# EAGLE board openmv-cc (EAGLE 6.1)
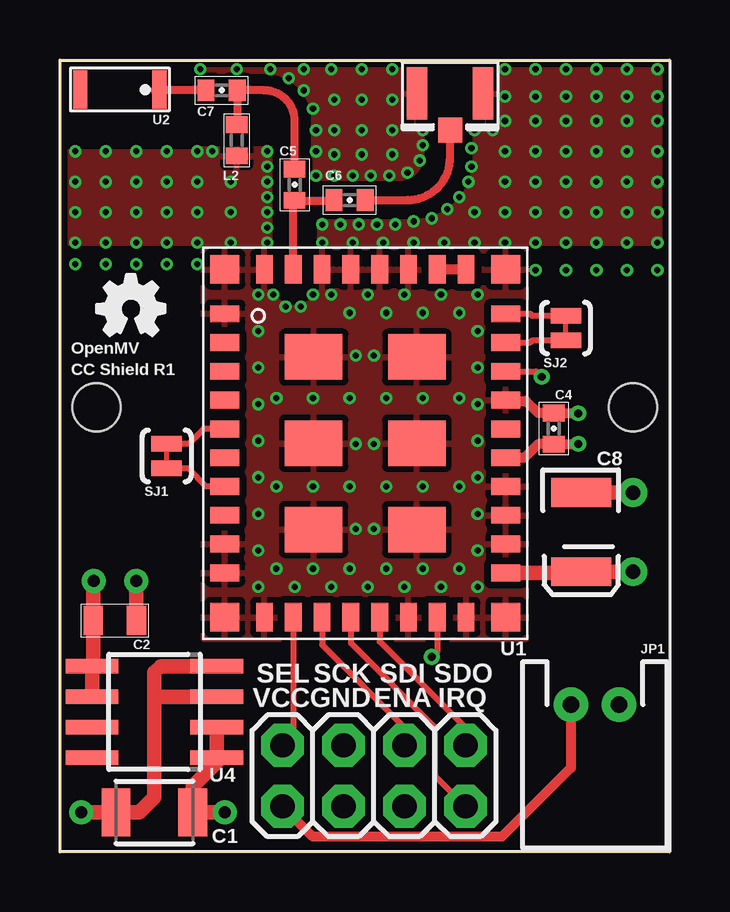
[diagram p0: board, top side]
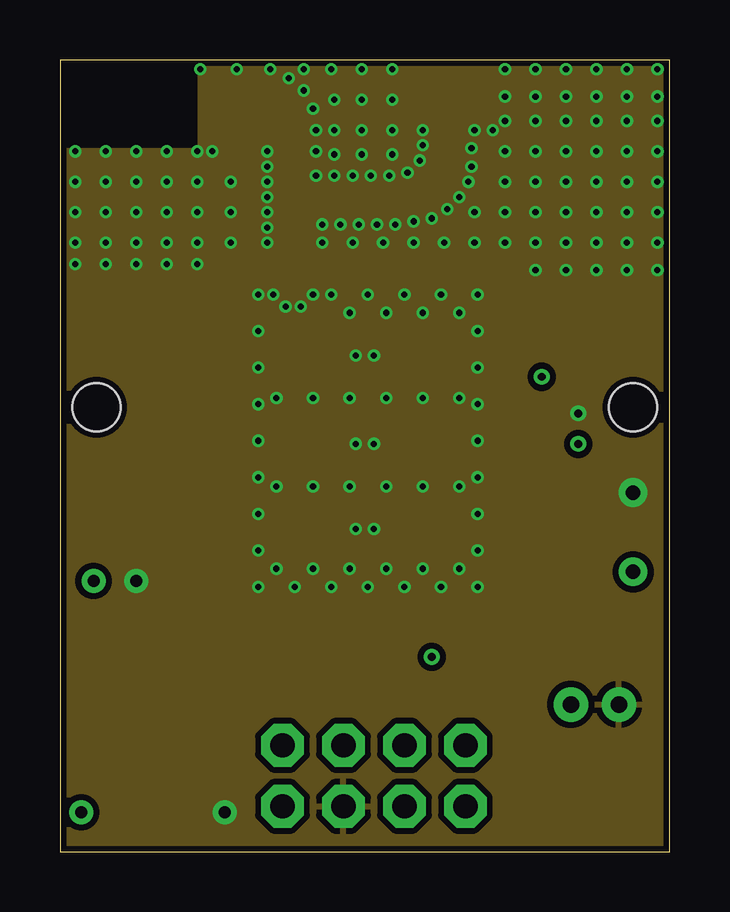
[diagram p1: board, inner layer Route2]
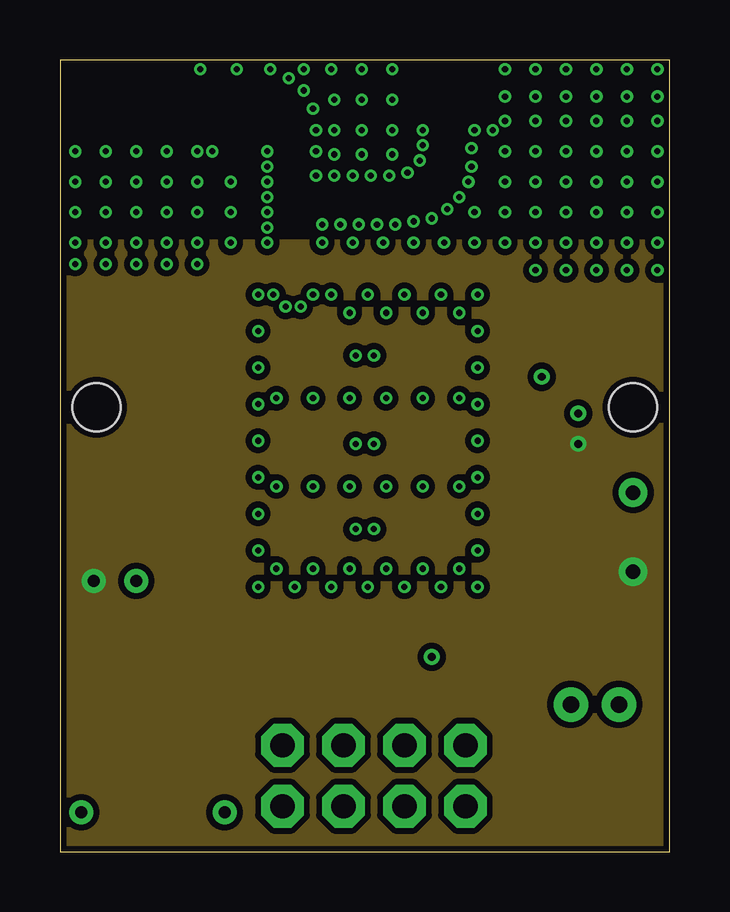
[diagram p2: board, inner layer Route15]
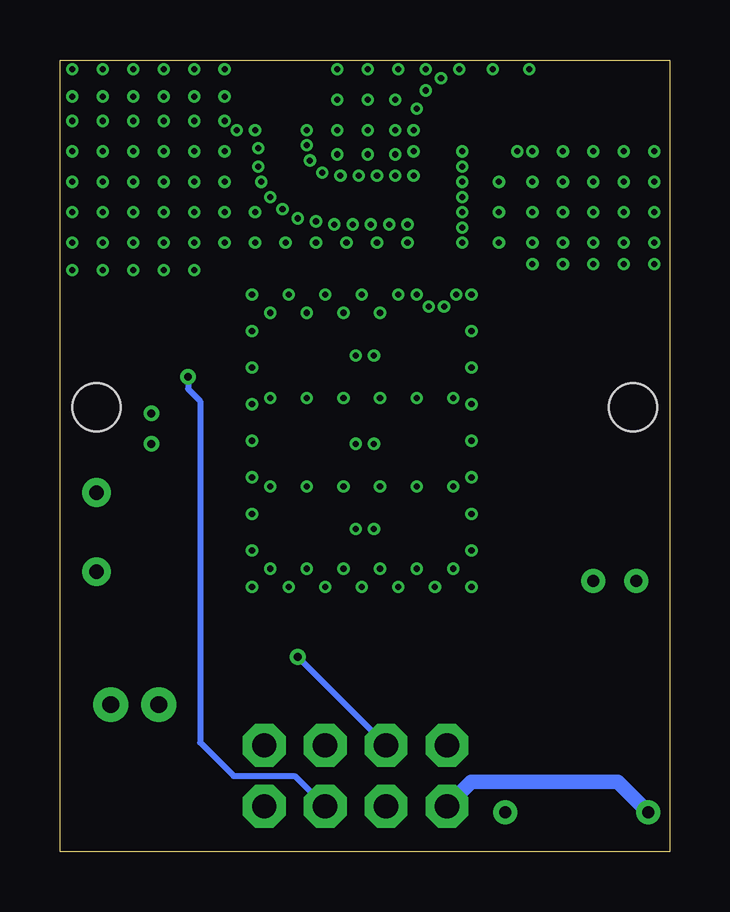
[diagram p3: board, bottom side, seen from below]

Size 25.4 x 33.02 mm. Coordinates in mm from the lower left corner, seen from the top.
Outline: 0,0 25.4,0 25.4,33.02 0,33.02 0,0
Copper layers (1*2+15*16): Top 0.035mm / dielectric 1.5mm / Route2 0.035mm / dielectric 0.15mm / Route15 0.035mm / dielectric 0.2mm / Bottom 0.035mm
Design rules: minimum track width 8mil, minimum drill 10mil, track to track 6mil, track to pad 6mil, pad to pad 6mil, via to via 6mil, smd to smd 6mil, copper to edge 5mil, drill to drill 10mil, minimum pad ring 10mil, minimum via ring 4mil, stop-mask expansion 2mil, vias tented up to drill 26mil, thermal gap 10mil
Net classes: 1 vcc: width 1.016 mm, clearance 0.203 mm; 2 antenna: width 0.363 mm, clearance 0.305 mm; 3 1.8v: width 0.457 mm, clearance 0.254 mm
tRestrict: area 0.3,29.7 to 5.3,32.9; area 5.8,23.2 to 17.3,32.6

## Footprints (pad centres in the part's own frame; a part is rotated, then mirrored left to right if it is on the bottom)
1210 = smd 1.2 x 2: 1 -1.6,0; 2 1.6,0
0805 = smd 0.8 x 1.2: 1 -0.9,0; 2 0.9,0
0402-CAP = smd 0.7 x 0.9: 1 -0.65,0; 2 0.65,0
EIA3528 = smd 1.2 x 2.5: A 1.65,0; C -1.65,0
JST-2-PTH = drill 0.7 pad 1.448: 1 -1,0; 2 1,0
C0402 = smd 0.7 x 0.9: 1 -0.65,0; 2 0.65,0
SJ_2S-TRACE = smd 0.635 x 1.27: 1 -0.508,0; 2 0.508,0
CC3000 = smd 1.2 x 0.7: P$1 0.9,13.55; P$2 0.9,12.35; P$3 0.9,11.15; P$4 0.9,9.95; P$5 0.9,8.75; P$6 0.9,7.55; P$7 0.9,6.35; P$8 0.9,5.15; P$9 0.9,3.95; P$10 0.9,2.75; P$19 12.6,2.75; P$20 12.6,3.95; P$21 12.6,5.15; P$22 12.6,6.35; P$23 12.6,7.55; P$24 12.6,8.75; P$25 12.6,9.95; P$26 12.6,11.15; P$27 12.6,12.35; P$28 12.6,13.55 | smd 0.7 x 1.2: P$11 2.55,0.9; P$12 3.75,0.9; P$13 4.95,0.9; P$14 6.15,0.9; P$15 7.35,0.9; P$16 8.55,0.9; P$17 9.75,0.9; P$18 10.95,0.9; P$29 10.95,15.4; P$30 9.75,15.4; P$31 8.55,15.4; P$32 7.35,15.4; P$33 6.15,15.4; P$34 4.95,15.4; P$35 3.75,15.4; P$36 2.55,15.4 | smd 2.4 x 1.9: P$37 4.6,11.75; P$38 4.6,8.15; P$39 4.6,4.55; P$40 8.9,11.75; P$41 8.9,8.15; P$42 8.9,4.55 | smd 1.2 x 1.2: P$43 0.9,15.4; P$44 0.9,0.9; P$45 12.6,0.9; P$46 12.6,15.4
ANTENNA = smd 1.6 x 0.6: P$1 0.8,0.3; P$2 0.8,3.6
U.FL = smd 2.2 x 0.85: P$1 0,1.375; P$2 0,-1.375 | smd 1.05 x 1: P$3 1.525,0
SOIC8 = smd 0.6 x 2.2: 1 -1.905,-2.6; 2 -0.635,-2.6; 3 0.635,-2.6; 4 1.905,-2.6; 5 1.905,2.6; 6 0.635,2.6; 7 -0.635,2.6; 8 -1.905,2.6
OPENMV = drill 1.016 pad 1.778 octagon: 1 16.891,4.445; 2 16.891,1.905; 3 14.351,4.445; 4 14.351,1.905; 5 11.811,4.445; 6 11.811,1.905; 7 9.271,4.445; 8 9.271,1.905 | hole 2: 1.524,18.542; 23.876,18.542

## Placement (x,y rotation side)
C1  47uF  [1210]  3.94,1.65 0 top
C2  10uF  [0805]  2.29,9.65 0 top
C4  1uF  [0402-CAP]  20.57,17.65 90 top
C5  10pF  [0402-CAP]  9.78,27.81 270 top
C6  10pF  [0402-CAP]  12.06,27.18 180 top
C7  2.2pF  [0402-CAP]  6.73,31.75 0 top
C8  100uF  [EIA3528]  21.72,13.34 270 top
JP1  JP3  [JST-2-PTH]  22.29,6.15 180 top
L2  2.2nH  [C0402]  7.37,29.67 270 top
LOGO1  OSHW_LOGO_FILLX0100-NT  [OSHW_FILLX100_NOTEXT]  1.54,21.53 0 top
SJ1  SOLDERJUMPERTRACE  [SJ_2S-TRACE]  4.45,16.51 90 top
SJ2  SOLDERJUMPERTRACE  [SJ_2S-TRACE]  21.08,21.84 90 top
U1  CC3000  [CC3000]  5.97,8.89 0 top
U2  ANT-YAGEO  [ANTENNA]  4.45,30.99 90 top
U3  U.FL  [U.FL]  16.26,31.62 270 top
U4  TPS768  [SOIC8]  3.94,5.84 90 top
U5  OPENMV  [OPENMV]  0,0 0 top

## Library data of the parts
C1 C2 C4-C8 JP1 SJ1 SJ2 U3 = sfe
L2 LOGO1 = iofault
U1 = CC3000; AUTHOR: Matt Bigarani; DATASHEET: http://www.ti.com/lit/ds/symlink/cc3000.pdf; DATE: 2/8/2013
U2 = CC3000
U4 = mux
U5 = openmv

## Nets
CC_CS: U1.P$12 U5.7
CC_EN: U1.P$26 U5.4
CC_IRQ: U1.P$14 U5.2
CC_MISO: U1.P$13 U5.3
CC_MOSI: U1.P$15 U5.1
CC_SCLK: U1.P$17 U5.5
GND: C1.2 C2.2 C4.2 C8.C JP1.1 L2.2 U1.P$1 U1.P$9 U1.P$10 U1.P$11 U1.P$16 U1.P$18 U1.P$20 U1.P$21 U1.P$22 U1.P$25 U1.P$31 U1.P$32 U1.P$33 U1.P$34 U1.P$36 U1.P$37 U1.P$38 U1.P$39 U1.P$40 U1.P$41 U1.P$42 U1.P$43 U1.P$44 U1.P$45 U1.P$46 U3.P$1 U3.P$2 U4.1 U4.2 U5.6
N$1: C5.1 C7.2 L2.1
N$3: SJ1.2 U1.P$5
N$4: SJ2.2 U1.P$28
N$5: SJ1.1 U1.P$7
N$6: SJ2.1 U1.P$27
N$13: C5.2 C6.2 U1.P$35
N$14: U1.P$29 U1.P$30
N$15: C7.1 U2.P$1
N$23: C6.1 U3.P$3
VCC: C2.1 C4.1 C8.A U1.P$19 U1.P$23 U4.5 U4.6
VIN: C1.1 JP1.2 U4.3 U4.4 U5.8

## Tracks (layer width: path | path; a pad name or v marks a point on that pad's centre or on a via)
CC_CS
  Top 0.254: U1.P$12 9.72,4.89 U5.7
CC_EN  (via drill 0.33)
  Top 0.254: U1.P$26 19.84,20.04 v20.07,19.81
  Bottom 0.254: v20.07,19.81 20.07,19.3 19.56,18.8 19.56,4.57 18.16,3.17 15.62,3.17 U5.4
CC_IRQ
  Top 0.254: U1.P$14 12.12,8.71 15.62,5.21 15.62,3.17 U5.2
CC_MISO
  Top 0.254: U1.P$13 10.92,8.64 14.35,5.21 U5.3
CC_MOSI
  Top 0.254: U1.P$15 13.32,8.78 16.89,5.21 U5.1
CC_SCLK  (via drill 0.33)
  Top 0.254: U1.P$17 15.72,8.35 v15.49,8.13
  Bottom 0.254: v15.49,8.13 U5.5
GND  (via drill 0.25, 0.33, 0.5, 0.6)
  Top 0.406: U1.P$25 18.6,18.81 19.42,18.81 19.92,18.3 C4.2 21.57,18.3 v21.59,18.29
  Top 0.61: C2.2 3.19,11.29 v3.17,11.3 | v6.86,1.65 C1.2 5.54,2.74 6.54,3.74 U4.1 U4.2 | C8.C v23.88,14.98 v23.88,14.99
  other vias: 8.89,23.24 9.4,22.73 10.03,22.73 10.54,23.24 8.26,23.24 11.3,23.24 12.83,23.24 14.35,23.24 15.88,23.24 17.4,23.24 17.4,21.72 8.26,21.72 8.26,20.19 8.26,18.67 8.26,17.14 8.26,15.62 8.26,14.1 8.26,12.57 8.26,11.05 9.78,11.05 11.3,11.05 12.83,11.05 14.35,11.05 15.88,11.05 17.4,11.05 17.4,12.57 17.4,20.19 17.4,18.67 17.4,17.14 17.4,15.62 17.4,14.1 16.64,22.48 15.11,22.48 13.59,22.48 12.06,22.48 16.64,11.81 15.11,11.81 13.59,11.81 12.06,11.81 10.54,11.81 9.02,11.81 13.08,20.7 12.32,20.7 12.32,17.02 13.08,17.02 12.32,13.46 13.08,13.46 9.02,18.92 10.54,18.92 12.06,18.92 13.59,18.92 15.11,18.92 16.64,18.92 9.02,15.24 10.54,15.24 12.06,15.24 13.59,15.24 15.11,15.24 16.64,15.24 5.84,32.64 7.37,32.64 10.67,28.19 12.19,28.19 12.95,28.19 13.72,28.19 14.48,28.32 13.84,32.64 14.99,28.83 15.11,30.1 15.11,29.46 10.16,31.75 10.54,30.99 10.67,30.1 10.67,29.21 11.43,28.19 13.84,31.37 1.91,25.4 3.17,25.4 4.45,25.4 5.71,25.4 4.45,29.21 7.11,25.4 10.92,25.4 8.64,26.04 8.64,26.67 8.64,27.94 8.64,28.57 8.64,29.21 8.64,27.3 7.11,27.94 5.71,29.21 8.64,25.4 3.17,29.21 1.91,29.21 0.64,29.21 4.45,27.94 3.17,27.94 1.91,27.94 0.64,25.4 1.91,26.67 5.71,26.67 4.45,26.67 3.17,26.67 0.64,26.67 0.64,27.94 5.71,27.94 10.92,26.16 11.68,26.16 12.45,26.16 13.21,26.16 13.97,26.16 14.73,26.29 15.49,26.42 16.13,26.8 17.02,27.94 16.64,27.3 17.14,28.57 17.14,29.34 17.27,30.1 11.3,32.64 9.53,32.26 8.76,32.64 0.64,24.51 1.91,24.51 4.45,24.51 3.17,24.51 22.35,24.26 21.08,24.26 19.81,24.26 23.62,24.26 24.89,24.26 12.19,25.4 13.46,25.4 14.73,25.4 16,25.4 17.27,25.4 18.54,25.4 19.81,25.4 21.08,25.4 22.35,25.4 23.62,25.4 24.89,25.4 24.89,26.67 24.89,27.94 24.89,29.21 24.89,30.48 24.89,31.5 24.89,32.64 23.62,32.64 22.35,32.64 21.08,32.64 19.81,32.64 18.54,32.64 18.54,31.5 18.54,30.48 19.81,31.5 21.08,31.5 22.35,31.5 23.62,31.5 23.62,30.48 23.62,29.21 23.62,27.94 23.62,26.67 22.35,26.67 22.35,27.94 22.35,29.21 22.35,30.48 21.08,30.48 21.08,29.21 21.08,27.94 21.08,26.67 19.81,26.67 19.81,27.94 19.81,29.21 19.81,30.48 18.54,29.21 18.54,27.94 18.54,26.67 17.27,26.67 18.03,30.1 12.57,32.64 13.84,30.1 10.16,32.64 12.57,31.37 12.57,30.1 12.57,29.08 13.84,29.08 11.43,29.08 11.43,30.1 11.43,31.37 6.35,29.21 5.71,24.51 7.11,26.67
  pour Top (isolate 0.305): 5.97,8.89 19.43,8.89 19.43,25.4 25.4,25.4 25.4,33.02 5.84,33.02 5.84,29.21 0,29.21 0,25.4 5.97,25.4
  pour Route2 (isolate 0.254): 0,0 25.4,0 25.4,33.02 5.84,33.02 5.84,29.21 0,29.21
N$1
  Top 0.33: L2.1 arc90 7.38,30.33 C7.2 8.51,31.75 arc-90 9.78,30.48 C5.1
N$3
  Top 0.254: U1.P$5 5.98,17.64 5.36,17.02 SJ1.2
N$4
  Top 0.254: U1.P$28 19.6,22.44 19.68,22.35 SJ2.2
N$5
  Top 0.254: SJ1.1 5.33,16 6.1,15.24 U1.P$7
N$6
  Top 0.254: U1.P$27 19.59,21.24 19.68,21.34 SJ2.1
N$13
  Top 0.33: U1.P$35 9.72,27.1 C5.2 11.4,27.16 C6.2
N$14
  Top 0.406: U1.P$29 U1.P$30
N$15
  Top 0.33: C7.1 3.93,31.75 arc-90 U2.P$1
N$23
  Top 0.33: C6.1 14.48,27.18 arc90 16.26,28.96 U3.P$3
VCC  (via drill 0.33, 0.5, 0.6)
  Top 0.406: v21.59,17.02 21.57,17 C4.1 19.92,17 19.36,16.44 U1.P$23
  Top 0.61: U4.6 U4.5 1.39,7.8 C2.1 1.39,11.29 v1.4,11.3 | C8.A 22.61,11.69 | 22.61,11.69 v23.88,11.69 v23.88,11.68 | U1.P$19 22.56,11.64 22.61,11.69
  pour Route15 (isolate 0.254): 0,0 25.4,0 25.4,25.4 0,25.4
VIN  (via drill 0.5)
  Top 0.406: JP1.2 21.29,3.51 18.41,0.64 10.54,0.64 U5.8
  Top 0.61: 3.94,6.48 3.94,2.29 3.3,1.65 C1.1 v0.89,1.65 | 3.94,6.48 3.94,7.49 4.19,7.75 U4.4 | U4.3 3.94,6.48
  Bottom 0.61: v0.89,1.65 2.16,2.92 8.26,2.92 U5.8

## Text on the board
tPlace: OpenMV | CC Shield R1 | SEL | SCK | SDI | SDO | VCC | GND | ENA | IRQ
Document: Antenna trace 12mils (50Ohms impedance) | Stackup: | 1 oz copper | 6.7 mil prepreg | 0.5 oz copper | 47 mil core | 0.5 oz copper | 6.7 mil prepreg | 1 oz copper | er is 3.66